# Altium PCB PCB1.PcbDoc
Units mil, origin at the board's own origin, x right, y up, seen from the top; angles counter-clockwise.
Board outline 2362.2 x 1574.8 mil, 2 copper layers (Top Layer, Bottom Layer); 33 components, 23 nets, 114 pads, 0 vias.
Unrouted connection lines stored in the file: 72.
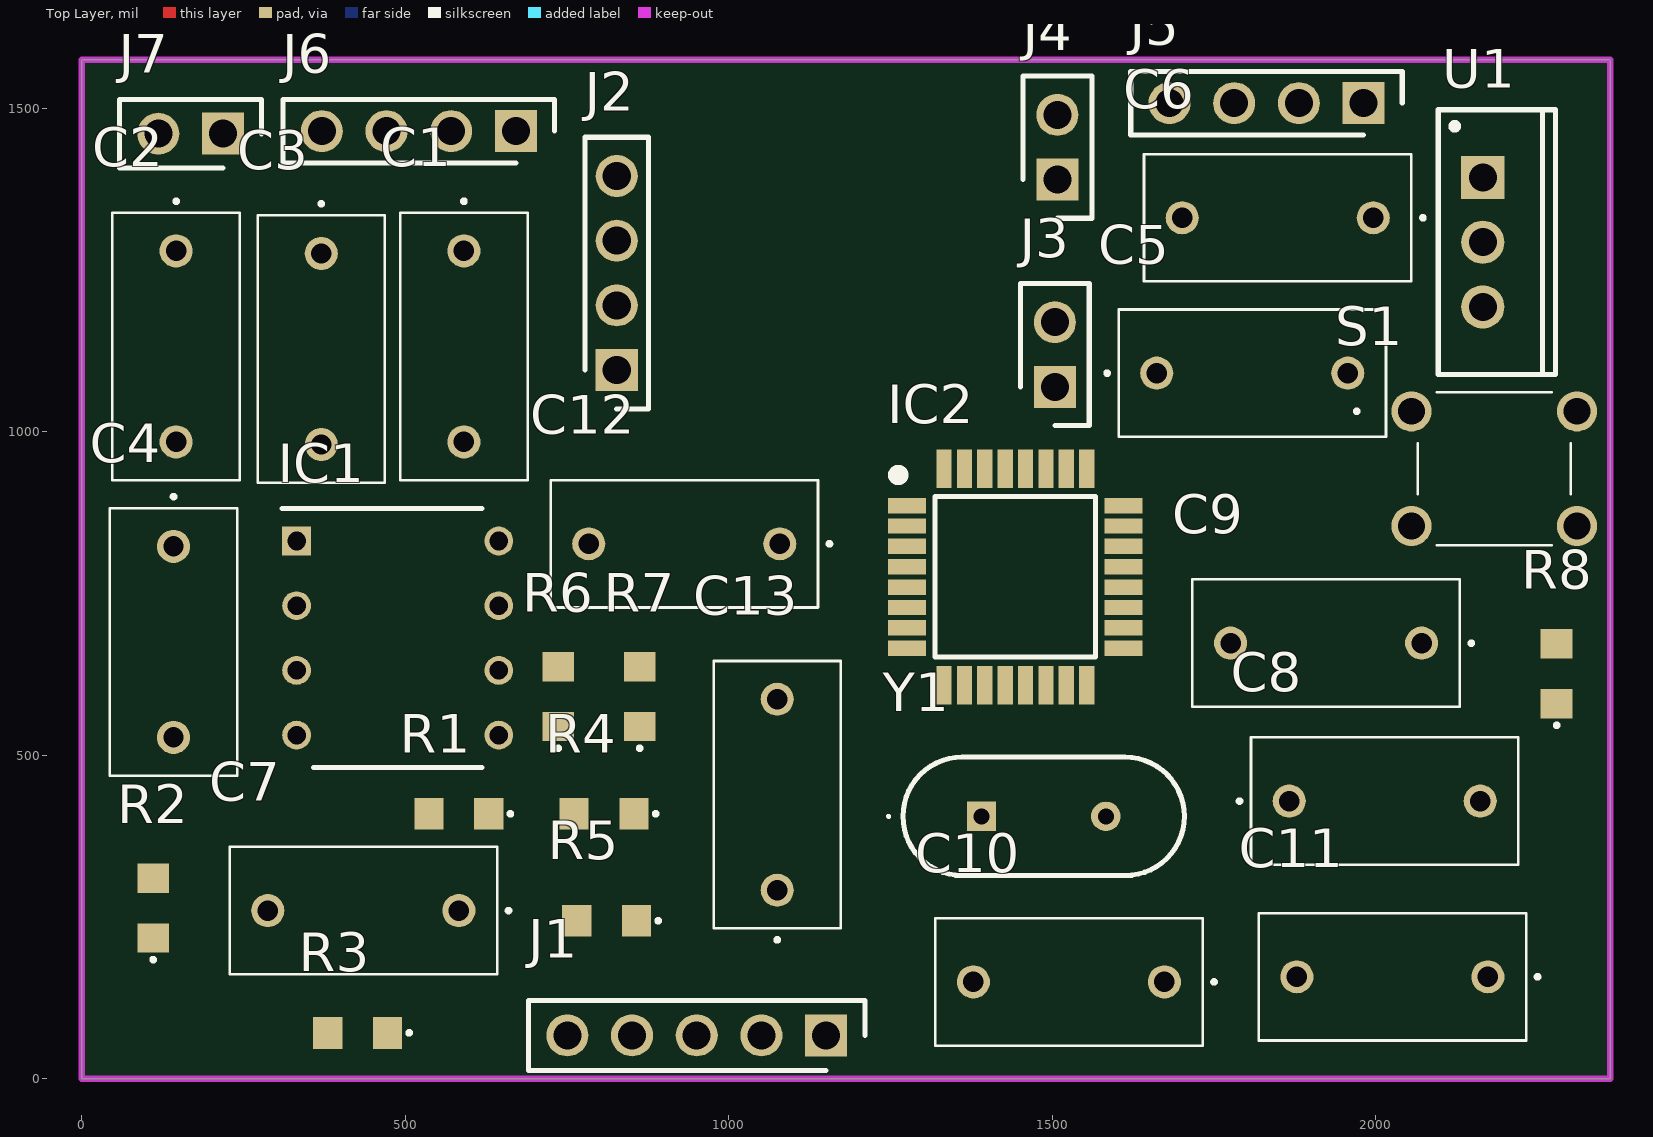
[diagram p0: Top Layer view]
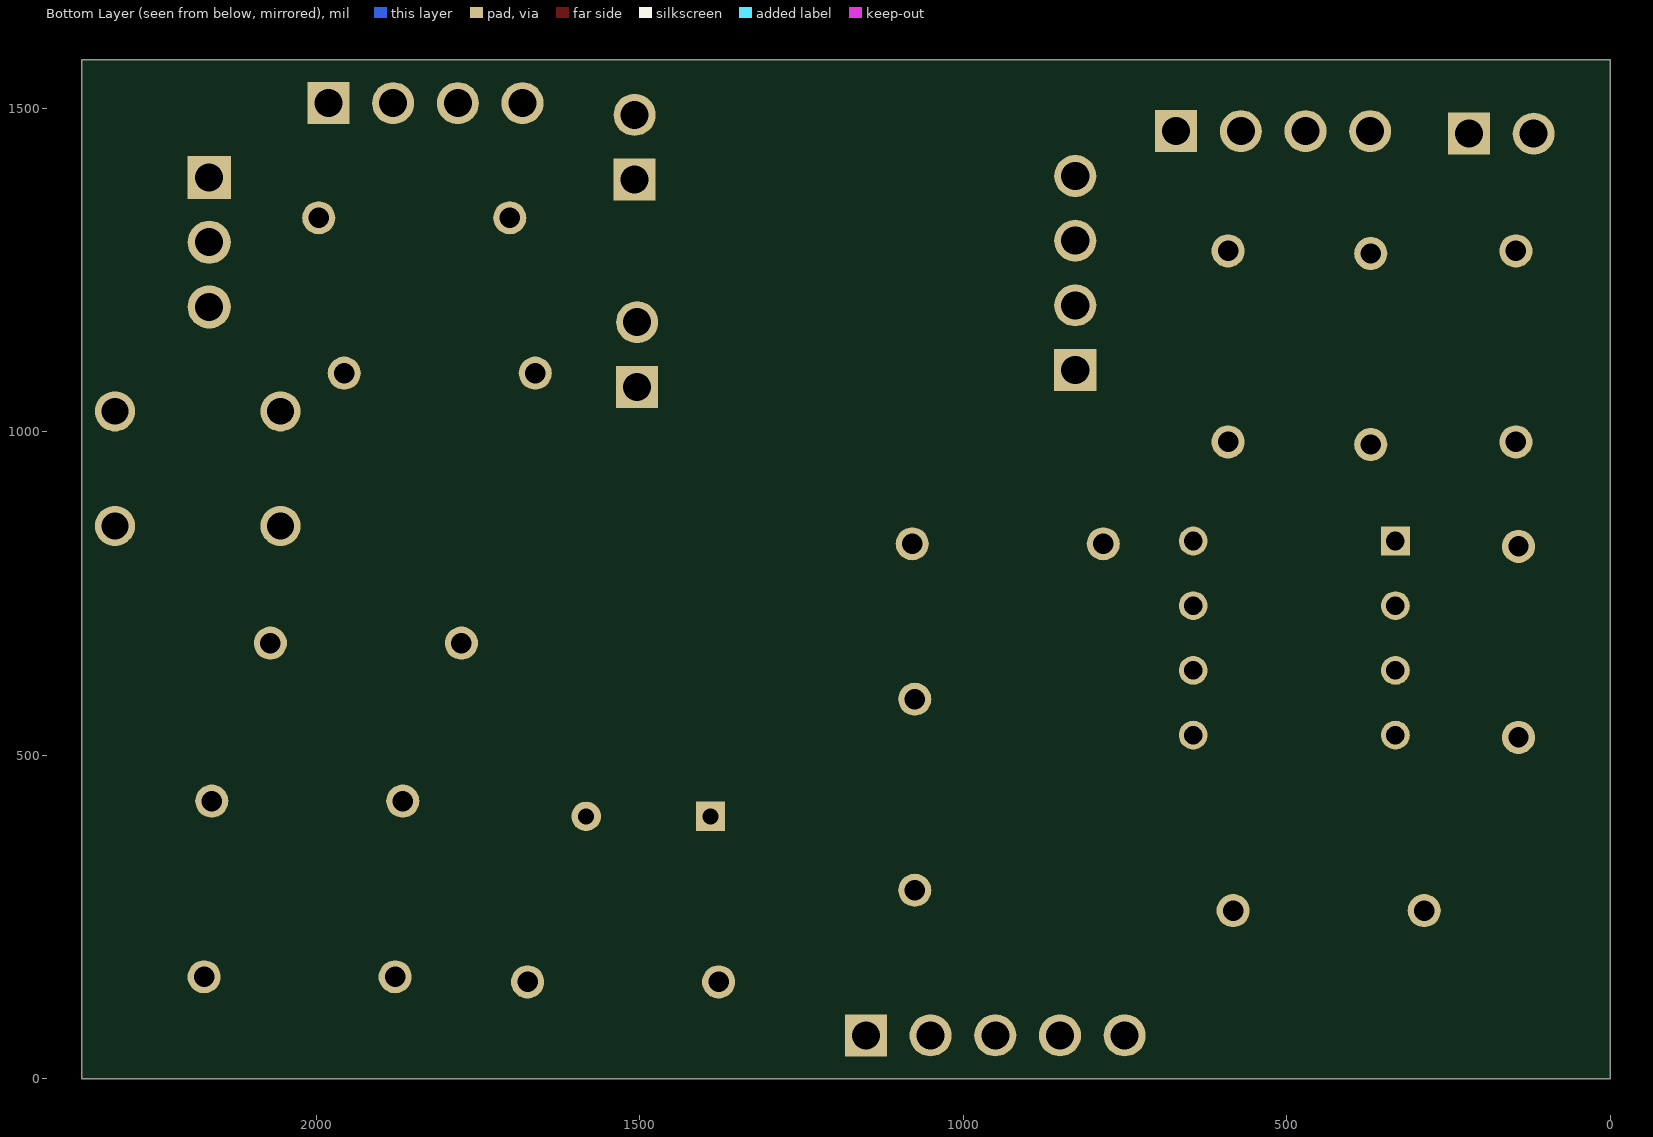
[diagram p1: Bottom Layer view, seen from below]

## Layer stack, top to bottom
Top Solder: solder mask 0.4, Solder Resist, Dk 3.5
Top Layer: signal copper 1.4
Dielectric 1: dielectric 12.6, FR-4, Dk 4.8
Bottom Layer: signal copper 1.4
Bottom Solder: solder mask 0.4, Solder Resist, Dk 3.5

## Board outline
0,0 0,1574.8 2362.2,1574.8 2362.2,0

## Design rules (kind name [scope] priority, off if disabled: settings)
Clearance [All] p1: gap=10 ignorepadtopadclearanceinfootprint=TRUE
PolygonConnect [All] p1: connectstyle=Relief reliefconductorwidth=10 reliefentries=4 polygonreliefangle="90 Angle" airgapwidth=10
RoutingVias [All] p1: holewidth=28 width=50 viastyle="Through Hole" minholewidth=28 minwidth=50 maxholewidth=28 maxwidth=50
SolderMaskExpansion [All] p1: expansion=4 istentingtop=FALSE
Width [All] p1: maxlimit=10 minlimit=10 preferedwidth=10
30 further rules are at their usual default settings.

## Components (designator, comment, footprint, x,y, rotation, side; value= is the part's Value field where it differs from the comment)
C1 "0.1mF Cap" VY2332M41Y5US63V7 590.55,1279.53 r270 top
C2 "100nF Cap" VY2332M41Y5US63V7 145.67,1279.53 r270 top
C3 "1mF Cap" VY2332M41Y5US63V7 370.08,1275.59 r270 top
C4 "0.1mF Cap" VY2332M41Y5US63V7 141.73,822.83 r270 top
C5 "0.22mF Cap" VY2332M41Y5US63V7 1661.42,1090.55 r0 top
C6 "0.1mF Cap" VY2332M41Y5US63V7 1996.06,1330.71 r180 top
C7 "1mF Cap" VY2332M41Y5US63V7 582.68,259.84 r180 top
C8 "100nF Cap" VY2332M41Y5US63V7 1866.14,429.13 r0 top
C9 "100nF Cap" VY2332M41Y5US63V7 2070.87,673.23 r180 top
C10 "22PF Cap" VY2332M41Y5US63V7 1673.23,149.61 r180 top
C11 "22PF Cap" VY2332M41Y5US63V7 2173.23,157.48 r180 top
C12 "10mF Cap" VY2332M41Y5US63V7 1078.74,826.77 r180 top
C13 "10mF Cap" VY2332M41Y5US63V7 1074.8,291.34 r90 top
IC1 "LM358PE4 OpAmp" DIP794W53P254L959H508Q8N 488.19,681.1 r0 top
IC2 "ATMEGA328P-AU" QFP80P900X900X120-32N 1442.91,775.59 r0 top
J1 "5 male headers" HDRV5W63P0X254_1X5_1270X254X970P 1150.39,66.93 r180 top
J2 "4 male headers" HDRV4W63P0X254_1X4_1016X250X950P 826.77,1095.28 r90 top
J3 "2 male headers" HDRV2W63P0X254_1X2_508X250X970P 1503.94,1069.29 r90 top
J4 "2 male headers" HDRV2W63P0X254_1X2_508X250X970P 1507.87,1389.76 r90 top
J5 "4 male headers" HDRV4W63P0X254_1X4_1016X250X950P 1981.1,1507.87 r180 top
J6 "4 male headers" HDRV4W63P0X254_1X4_1016X250X950P 670.87,1464.57 r180 top
J7 "2 male headers" HDRV2W63P0X254_1X2_508X250X970P 218.11,1460.63 r180 top
R1 "680k s R" ERJUP6 582.68,409.45 r180 top
R2 "1k s R" ERJUP6 110.24,263.78 r90 top
R3 "680k s R" ERJUP6 426.18,70.87 r180 top
R4 "68k s R" ERJUP6 807.09,409.45 r180 top
R5 "6.8k s R" ERJUP6 811.02,244.09 r180 top
R6 "68k s R" ERJUP6 736.22,590.55 r90 top
R7 "6.8k s R" ERJUP6 862.2,590.55 r90 top
R8 "10k s R" ERJUP6 2279.53,625.98 r90 top
S1 "MJTP1230A" MJTP1230A 2055.12,1031.5 r0 top
U1 "L7805CV" TO220 2165.35,1292.91 r270 top
Y1 "Ocillator" XT9S20ANA8M 1390.55,405.51 r0 top

## Footprints (in the part's own frame and the unit in brackets; to place one, negate y for a bottom-side part, rotate by r counter-clockwise, add the part's x,y. Pads: shape width x height; smd on the part's side, far side on the other; paste and mask are expansions set on the pad)
DIP794W53P254L959H508Q8N [mm]
  rect 1.13x1.13 hole 0.73: 1(-3.97,3.81)
  round 1.13 hole 0.73: 2(-3.97,1.27) 3(-3.97,-1.27) 4(-3.97,-3.81) 5(3.97,-3.81) 6(3.97,-1.27) 7(3.97,1.27) 8(3.97,3.81)
  silkscreen extent -4.53,-5.08 3.3,5.08, body extent -4.1,-4.64 4.1,4.64, height 4.21
ERJUP6 [mm]
  rect 1.15x1.25 smd: 1(-1.175,0) 2(1.175,0)
  silkscreen extent -2.07,-0.05 -1.98,0.05, body extent -1,-0.63 1,0.63, height 0.6
HDRV2W63P0X254_1X2_508X250X970P [mm]
  rect 1.65x1.65 hole 1.1: 1(0,0)
  round 1.65 hole 1.1: 2(2.54,0)
  silkscreen extent -1.52,-1.35 4.06,1.35, body extent -1.27,-1.25 3.81,1.25, height 9.5
HDRV4W63P0X254_1X4_1016X250X950P [mm]
  rect 1.65x1.65 hole 1.1: 1(0,0)
  round 1.65 hole 1.1: 2(2.54,0) 3(5.08,0) 4(7.62,0)
  silkscreen extent -1.52,-1.25 9.14,1.25, body extent -1.27,-1.25 8.89,1.25, height 9.5
HDRV5W63P0X254_1X5_1270X254X970P [mm]
  rect 1.65x1.65 hole 1.1: 1(0,0)
  round 1.65 hole 1.1: 2(2.54,0) 3(5.08,0) 4(7.62,0) 5(10.16,0)
  silkscreen extent -1.52,-1.37 11.68,1.37, body extent -1.16,-2.28 11.54,1.37, height 9.5
MJTP1230A [mm]
  round 1.575 hole 1.05: 1(0,0) 2(0,-4.5) 3(6.5,-4.5) 4(6.5,0)
  silkscreen extent -2.2,-5.25 6.25,0.75, body extent -0.43,-5.25 6.93,0.75, height 5.1
QFP80P900X900X120-32N [mm]
  rect 1.5x0.6 smd: 1(-4.25,2.8) 2(-4.25,2) 3(-4.25,1.2) 4(-4.25,0.4) 5(-4.25,-0.4) 6(-4.25,-1.2) 7(-4.25,-2) 8(-4.25,-2.8) 17(4.25,-2.8) 18(4.25,-2) 19(4.25,-1.2) 20(4.25,-0.4) 21(4.25,0.4) 22(4.25,1.2) 23(4.25,2) 24(4.25,2.8)
  rect 0.6x1.5 smd: 9(-2.8,-4.25) 10(-2,-4.25) 11(-1.2,-4.25) 12(-0.4,-4.25) 13(0.4,-4.25) 14(1.2,-4.25) 15(2,-4.25) 16(2.8,-4.25) 25(2.8,4.25) 26(2,4.25) 27(1.2,4.25) 28(0.4,4.25) 29(-0.4,4.25) 30(-1.2,4.25) 31(-2,4.25) 32(-2.8,4.25)
  silkscreen extent -4.8,-3.15 3.15,4.2, body extent -4.5,-4.5 4.5,4.5, height 1.2
TO220 [mm] "TO, Thru-Hole, Vertical, Heatsink Mounted; 3 In-Line Leads; Pitch 2.54 mm"
  rect 1.7x1.7 hole 1.1: 1(-2.54,0)
  round 1.7 hole 1.1: 2(0,0) 3(2.54,0)
  silkscreen extent -5.2,-1.75 5.2,2.85, body extent -5.25,-1.8 5.25,2.9, height 19.7
VY2332M41Y5US63V7 [mm]
  round 1.3 hole 0.8: 1(0,0) 2(7.5,0)
  silkscreen extent -2,-2.5 9,2.5, body extent -1.46,-2.5 8.96,2.5, height 14.13
XT9S20ANA8M [mm]
  rect 1.155x1.155 hole 0.63: 1(0,0)
  round 1.155 hole 0.63: 2(4.88,0)
  silkscreen extent -3.7,-2.32 7.96,2.32, body extent -3.09,-2.32 7.97,2.32, height 3.6

## Part data
C1 C2 C3 C4 C5 C6 C7 C8 C9 C10 C11 C12 C13: "Capacitor", Manufacturer_Name=Vishay, Manufacturer_Part_Number=VY2332M41Y5US63V7, Mouser Part Number=72-VY2332M41Y5US63V7, Datasheet Link=https://datasheet.datasheetarchive.com/originals/dk/DKDS-39/9814.pdf, Height=13.5mm, Mouser Price/Stock=https://www.mouser.co.uk/ProductDetail/Vishay-BC-Components/VY2332M41Y5US63V7?qs=YhDfSRCt1jTfstvwiD5kGA%3D%3D
IC1: "Integrated Circuit", Arrow Part Number=LM358PE4, Manufacturer_Name="Texas Instruments", Mouser Part Number=595-LM358PE4, Arrow Price/Stock=https://www.arrow.com/en/products/lm358pe4/texas-instruments?region=nac, Datasheet Link=http://www.ti.com/lit/ds/symlink/lm358.pdf, Height=5.08mm, Manufacturer_Part_Number=LM358PE4, Mouser Price/Stock=https://www.mouser.co.uk/ProductDetail/Texas-Instruments/LM358PE4?qs=VBduBm9rCJTWtuRHSrRjAg%3D%3D
IC2: "Integrated Circuit", Manufacturer_Name=Microchip, Mouser Part Number=556-ATMEGA328P-AU, Arrow Part Number=ATMEGA328P-AU, Arrow Price/Stock=https://www.arrow.com/en/products/atmega328p-au/microchip-technology?region=europe, Datasheet Link=https://componentsearchengine.com/Datasheets/2/ATMEGA328P-AU.pdf, Height=1.2mm, Manufacturer_Part_Number=ATMEGA328P-AU, Mouser Price/Stock=https://www.mouser.co.uk/ProductDetail/Microchip-Technology/ATMEGA328P-AU?qs=K8BHR703ZXiCmmgp6%2FGNmQ%3D%3D
J1: "Connector", Arrow Part Number=825433-5, Manufacturer_Name="TE Connectivity", Mouser Part Number=571-825433-5, Arrow Price/Stock=https://www.arrow.com/en/products/825433-5/te-connectivity?region=europe, Datasheet Link=https://www.te.com/commerce/DocumentDelivery/DDEController?Action=srchrtrv&DocNm=825433&DocType=Customer+Drawing&DocLang=English&DocFormat=pdf&PartCntxt=825433-5, Height=9.7mm, Manufacturer_Part_Number=825433-5, Mouser Price/Stock=https://www.mouser.co.uk/ProductDetail/TE-Connectivity/825433-5?qs=Yxch5oR%2FTsPo6cKMIYPWXA%3D%3D
J2 J5 J6: "Connector", Arrow Part Number=826629-4, Manufacturer_Name="TE Connectivity", Mouser Part Number=571-826629-4, Arrow Price/Stock=https://www.arrow.com/en/products/826629-4/te-connectivity?region=europe, Datasheet Link=https://componentsearchengine.com/Datasheets/2/826629-4.pdf, Height=9.5mm, Manufacturer_Part_Number=826629-4, Mouser Price/Stock=https://www.mouser.co.uk/ProductDetail/TE-Connectivity/826629-4?qs=FazuUmncXom81cYQ0o6zwQ%3D%3D
J3 J4 J7: "Connector", Arrow Part Number=826926-2, Manufacturer_Name="TE Connectivity", Mouser Part Number=571-826926-2, Arrow Price/Stock=https://www.arrow.com/en/products/826926-2/te-connectivity?region=europe, Datasheet Link=http://www.te.com/commerce/DocumentDelivery/DDEController?Action=showdoc&DocId=Customer+Drawing%7F826629%7FAB%7Fpdf%7FEnglish%7FENG_CD_826629_AB.pdf%7F826926-2, Height=9.7mm, Manufacturer_Part_Number=826926-2, Mouser Price/Stock=https://www.mouser.co.uk/ProductDetail/TE-Connectivity/826926-2?qs=wMzmFFBcbXSakt8A2XXzBg%3D%3D
R1 R2 R3 R4 R5 R6 R7 R8: "Resistor", Manufacturer_Name=Panasonic, Manufacturer_Part_Number=ERJ-UP6F5760V, Mouser Part Number=667-ERJ-UP6F5760V, Datasheet Link=https://industrial.panasonic.com/cdbs/www-data/pdf/RDP0000/AOA0000C337.pdf, Height=0.7mm, Mouser Price/Stock=https://www.mouser.co.uk/ProductDetail/Panasonic/ERJ-UP6F5760V?qs=dbcCsuKDzFWkTsFWGgr5lA%3D%3D
S1: "Switch", Manufacturer_Name=Apem, Mouser Part Number=642-MJTP1230A, Datasheet Link=https://componentsearchengine.com/Datasheets/2/MJTP1230A.pdf, Height=5mm, Manufacturer_Part_Number=MJTP1230A, Mouser Price/Stock=https://www.mouser.co.uk/ProductDetail/Apem/MJTP1230A?qs=Uv2m1HzDAyrCq22V7auhWA%3D%3D
U1: library part CMP-0244-00483-1, "Positive Voltage Regulator, 5V, 3-Pin TO-220", ComponentLink1Description="Manufacturer URL", ComponentLink1URL=http://www.st.com, ComponentLink2Description=Datasheet, ComponentLink2URL=http://www.st.com/internet/com/TECHNICAL_RESOURCES/TECHNICAL_LITERATURE/DATASHEET/CD00000444.pdf, ComponentLink3Description="Package Specification", ComponentLink3URL=http://www.st.com/internet/com/TECHNICAL_RESOURCES/TECHNICAL_LITERATURE/PACKAGE_INFORMATION/CD00004649.pdf, DatasheetVersion=16/11/2011, PackageDescription="TO, Thru-Hole, Vertical, Heatsink Mounted; 3 In-Line Leads; Pitch 2.54 mm", PackageReference=TO220, PackageVersion=ver3.0
Y1: "Crystal or Oscillator", Arrow Part Number=XT9S20ANA8M, Manufacturer_Name=Vishay, Mouser Part Number=73-XT49S800-20, Arrow Price/Stock=https://www.arrow.com/en/products/xt9s20ana8m/vishay?region=nac, Datasheet Link=https://www.vishay.com/docs/35014/xt49s.pdf, Height=3.5mm, Manufacturer_Part_Number=XT9S20ANA8M, Mouser Price/Stock=https://www.mouser.co.uk/ProductDetail/Vishay-Dale/XT9S20ANA8M?qs=oFi4%2FQsgZXYxL7wCZW5FzA%3D%3D

## Nets (pads, with @x,y where several pads share a name; then routed paths per layer and width w, separated by ;. In a path a pad name is that pad's centre, name@x,y a point inside that pad or via, vN(x,y) a via of type N, cw(c..) or ccw(c..) an arc to the next point about the centre after c; other vN are vias at no path point)
+5V: C6.1 C9.1 C12.1 C13.1 IC1.8 IC2.4 IC2.6 IC2.18 J5.1 S1.1 U1.3
-V1: C4.1 IC1.2 R3.1 R5.2
-V2: C1.1 IC1.6 R1.1 R7.2
D2: IC2.32 R8.1 S1.2
D5: IC2.9 J1.1
D6: IC2.10 J6.2
D7: IC2.11 J6.3
Ground: C2.2 C5.2 C6.2 C8.2 C9.2 C10.1 C11.1 C12.2 C13.2 IC1.4 IC2.3 IC2.5 IC2.21 J1.4 J1.5 J2.3 J2.4 J3.1 J5.4 J6.4 R4.1 R5.1 R6.1 R7.1 R8.2 U1.2
NetC2_1: C2.1 C7.1 R2.2
NetC3_1: C3.1 C4.2 IC1.1 R3.2
NetC3_2: C3.2 IC1.5 R6.2
NetC5_1: C5.1 J4.2 U1.1
NetC7_2: C7.2 IC1.3 R4.2
NetC8_1: C8.1 IC2.20
NetC10_2: C10.2 IC2.7 Y1.1
NetC11_2: C11.2 IC2.8 Y1.2
NetIC2_25: IC2.25 J6.1
NetJ1_2: J1.2 J1.3 R2.1
RX: IC2.31 J7.1
SCL: IC2.27 J5.2
SDA: IC2.28 J5.3
TX: IC2.30 J7.2
Vout: C1.2 IC1.7 IC2.23 R1.2
pads on no net: IC2.1 IC2.2 IC2.12 IC2.13 IC2.14 IC2.15 IC2.16 IC2.17 IC2.19 IC2.22 IC2.24 IC2.26 IC2.29 J2.1 J2.2 J3.2 J4.1 S1.3 S1.4

## Keep-outs
Top Layer:
  the board outline again, w10